# Altium PCB ATWILC1000-MR110UB_ATWINC15x0_MR210UB.PcbDoc
Units mm, origin at the board's own origin, x right, y up, seen from the top; angles counter-clockwise.
Board outline 14.73 x 21.72 mm, 4 copper layers (Top Layer, GND, PWR, Bottom Layer), stack 0.747 mm thick; 35 components, 38 nets, 191 pads, 221 vias.
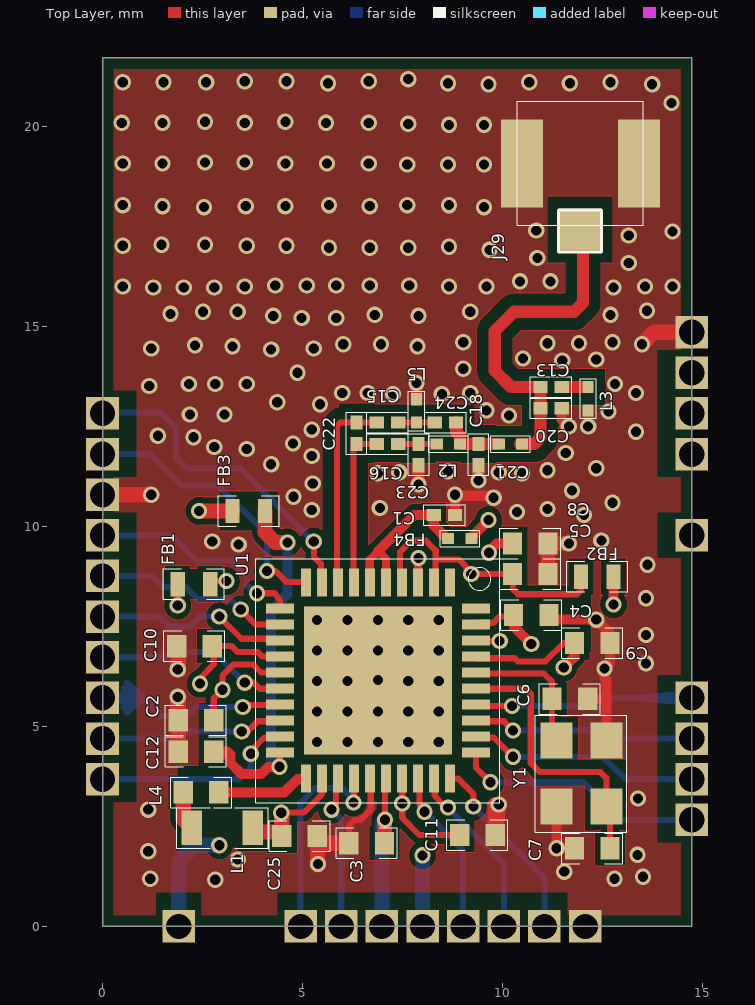
[diagram p0: Top Layer view]
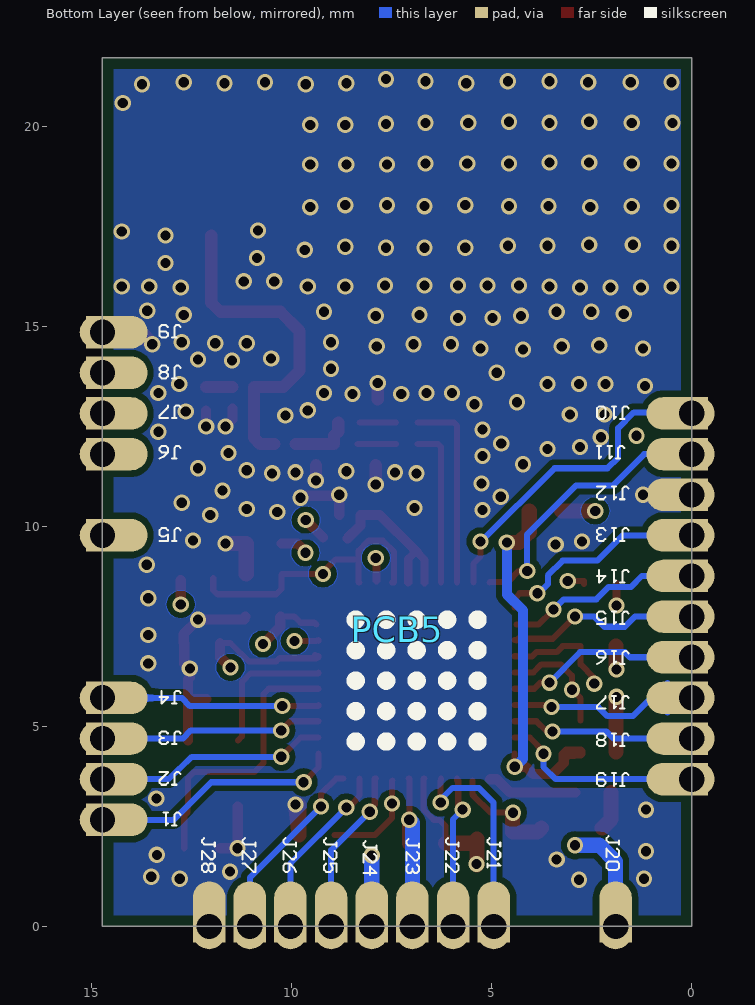
[diagram p1: Bottom Layer view, seen from below]
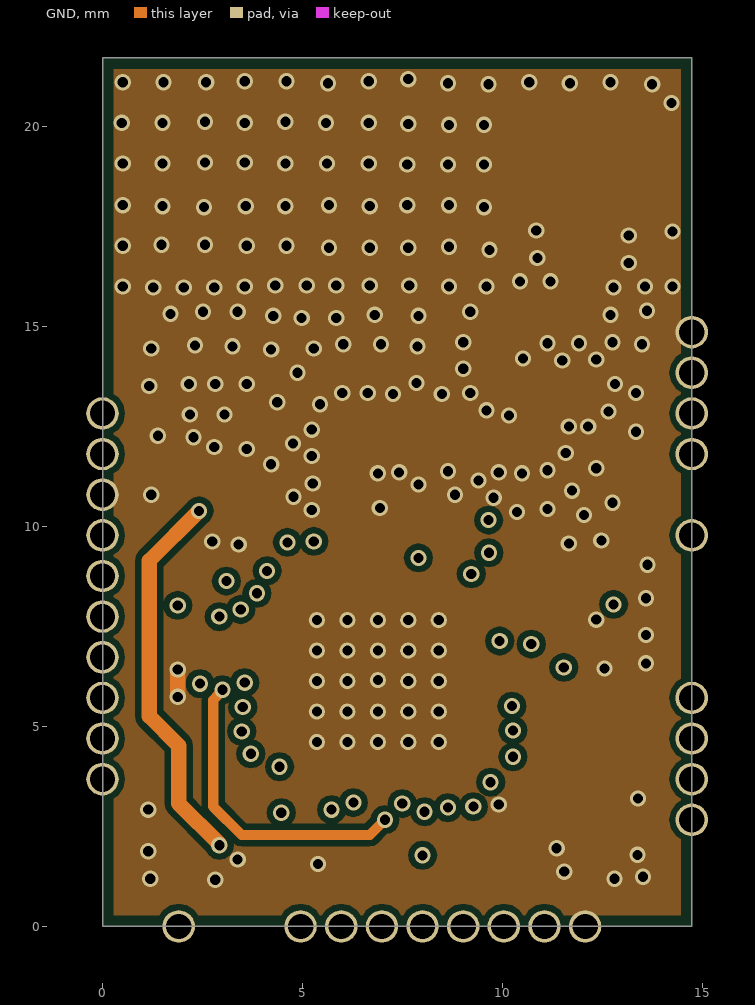
[diagram p2: GND]
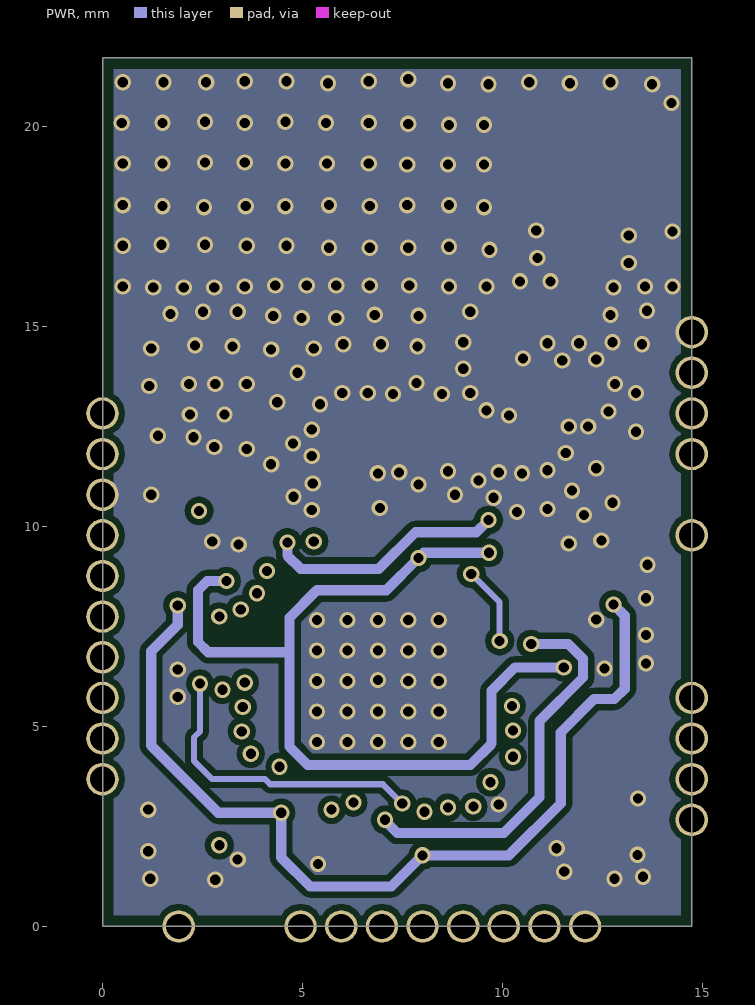
[diagram p3: PWR]

## Layer stack, top to bottom
Top Solder: solder mask 0.0102, Solder Resist, Dk 3.5
Top Layer: signal copper 0.0343
Dielectric 1: prepreg 0.2286, PP-006, Dk 4.1
GND: signal copper 0.0343
Dielectric 2: prepreg 0.1524, PP-006, Dk 4.1
PWR: signal copper 0.0343
Dielectric 3: prepreg 0.2286, PP-006, Dk 4.1
Bottom Layer: signal copper 0.0343
Bottom Solder: solder mask 0.0102, Solder Resist, Dk 3.5

## Board outline
0,0 14.73,0 14.73,21.72 0,21.72

## Design rules (kind name [scope] priority, off if disabled: settings)
Clearance [All] p1: gap=0.152 ignorepadtopadclearanceinfootprint=TRUE except(0.102: Track-SMDPad Track-Via SMDPad-Via)
ComponentClearance [All] p1: gap=0 collisioncheckmode=3 verticalgap=0 showdistances=FALSE
HoleToHoleClearance [All] p1 off: gap=0.254 allowstackedmicrovias=TRUE
MinimumSolderMaskSliver [All] p1 off: minsoldermaskwidth=0.254
PlaneConnect [All] p1: planeconnectstyle=Direct reliefexpansion=0.508 reliefentries=4 reliefconductorwidth=0.254 reliefairgap=0.254
PolygonConnect [All] p1: connectstyle=Direct reliefconductorwidth=0.254 reliefentries=4 polygonreliefangle="90 Angle" airgapwidth=0.254
RoutingVias [All] p1: holewidth=0.711 width=1.27 viastyle="Through Hole" minholewidth=0.711 minwidth=1.27 maxholewidth=0.711 maxwidth=1.27
SilkToSilkClearance [All] p1 off: silktosilkclearance=0.102
SilkToSolderMaskClearance [IsPad] p1 off: minsilkscreentomaskgap=0.254 clearancetoexposedcopper=TRUE
SolderMaskExpansion [All] p1: expansion=0.102 istentingtop=FALSE
Width [All] p1: maxlimit=0.406 minlimit=0.127 preferedwidth=0.127
24 further rules are at their usual default settings.

## Components (designator, comment, footprint, x,y, rotation, side; value= is the part's Value field where it differs from the comment)
C1 "CAP_1.0uF_0201" C0201 8.278,10.287 r270 top value=1.0uF
C2 "CAP_0.1uF_0402" 0402_M 2.335,5.156 r180 top value=0.1uF
C3 "CAP_0.1uF_0402" 0402_M 6.602,2.083 r180 top value=0.1uF
C4 "CAP_0.1uF_0402" 0402_M 10.717,7.788 r0 top value=0.1uF
C5 "CAP_1.0uF_0402" 0402_M 10.691,8.814 r0 top value=1.0uF
C6 "CAP_6.8pF_0402" 0402_M 11.682,5.69 r180 top value=6.8PF
C7 "CAP_6.8pF_0402" 0402_M 12.241,1.956 r0 top value=6.8PF
C8 "CAP_2.2uF_0402" 0402_M 10.691,9.576 r0 top value=2.2uF
C9 "CAP_0.1uF_0402" 0402_M 12.241,7.087 r0 top value=0.1uF
C10 "CAP_0.1uF_0402" 0402_M 2.297,7.01 r180 top value=0.1uF
C11 "CAP_2.2uF_0402" 0402_M 9.371,2.286 r0 top value=2.2uF
C12 "CAP_1.0uF_0402" 0402_M 2.335,4.369 r180 top value=1.0uF
C13 "CAP_0.5pF_0201" C0201 10.945,13.487 r270 top value=0.5PF
C15 "CAP_1.8pF_0201" C0201 7.389,12.598 r90 top value=1.8PF
C16 "CAP_1.8pF_0201" C0201 7.389,12.065 r90 top value=1.8PF
C18 "CAP_1.5pF_0201" C0201 9.396,12.065 r180 top value=1.5PF
C20 "CAP_1.5pF_0201" C0201 10.945,12.954 r270 top value=1.5PF
C21 "IND_2.6nH" LQP03T_0201 10.488,12.065 r90 top value=2.6nH
C22 "CAP_DNI" C0201 6.348,12.598 r180 top value=DNI
C23 "CAP_1pF_0201" C0201 7.897,12.065 r180 top value=1pF
C24 "CAP_1pF_0201" C0201 8.304,12.598 r270 top value=1pF
C25 "CAP_4.7uF_0402" 0402_M 4.926,2.261 r0 top value=4.7uF
FB1 "FB_BLM15AG121SN1" FB_M 2.284,8.56 r0 top value=BLM15AG121SN1D
FB2 "FB_BLM15AG121SN1" FB_M 12.368,8.748 r180 top value=BLM15AG121SN1D
FB3 "FB_BLM15AG121SN1" FB_M 3.656,10.389 r0 top value=BLM15AG121SN1D
FB4 "FB_BLM03AG121SN1D" LQP03T_0201 8.639,9.703 r270 top value=BLM03AG121SN1
J29 "U.FL-R-SMT" RECT_U_FL-R-SMT 11.936,17.425 r0 top locked value=U.FL-R-SMT-1(80)
L1 "IND_2.2uH" 0603_M 2.995,2.464 r0 top value=2.2uH
L2 "IND_3.3nH" LQP03T_0201 8.939,12.065 r90 top value=3.3nH
L3 "IND_1.7nH" LQP03T_0201 12.139,13.487 r180 top value=1.7nH
L4 "IND_15nH" 0402_M 2.462,3.353 r180 top value=15nH
L5 "IND_3.3nH" LQP03T_0201 7.847,12.598 r0 top value=3.3nH
PCB5 "WINC1500_Module_PAD" "module footprint" 14.73,0 r90 top
U1 "ATWINC1500B-MU-T" QFN-40-5X5-P4-HP85 6.881,6.16 r270 top
Y1 "26MHz_XTAL" FCX-05 12.596,2.997 r90 top value=26.000MHz

## Footprints (in the part's own frame and the unit in brackets; to place one, negate y for a bottom-side part, rotate by r counter-clockwise, add the part's x,y. Pads: shape width x height; smd on the part's side, far side on the other; paste and mask are expansions set on the pad)
0402_M [mil]
  rect 19x22 smd: 1(-17.5,0) 2(17.5,0)
  silkscreen extent -30,-15 30,15
0603_M [mil]
  rect 20x34 smd: 1(-30,0) 2(30,0)
  silkscreen extent -45,-20 45,20
C0201 [mil]
  rect 12x14 smd: 1(0,0) 2(0,21)
  silkscreen extent -10,-10 10,31
FB_M [mil]
  rect 14x24 smd: 1(-16,0) 2(16,0)
  silkscreen extent -30,-15 30,15
FCX-05 [mil]
  rect 35.4x31.5 smd: 1(0,0) 2(65,0) 3(65,49.2) 4(0,49.2)
  silkscreen extent -25,-20 90,70
LQP03T_0201 [mil]
  rect 11x12 smd: 1(0,0) 2(0,23)
  silkscreen extent -8,-8 8,31
"module footprint" [mil]
  rect 32x32 / inner round 32 / far side rect 32x32 hole 25: J1(105,0) J2(145,0) J3(185,0) J4(225,0) J5(385,0) J6(465,0) J7(505,0) J8(545,0) J9(585,0) J10(505,580) J11(465,580) J12(425,580) J13(385,580) J14(345,580) J15(305,580) J16(265,580) J17(225,580) J18(185,580) J19(145,580) J20(0,505) J21(0,385) J22(0,345) J23(0,305) J24(0,265) J25(0,225) J26(0,185) J27(0,145) J28(0,105)
  oval 32x66.93 smd far side paste-33.46 mask+2: J1(105,11.02) J2(145,11.02) J3(185,11.02) J4(225,11.02) J5(385,11.02) J6(465,11.02) J7(505,11.02) J8(545,11.02) J9(585,11.02) J10(505,568.98) J11(465,568.98) J12(425,568.98) J13(385,568.98) J14(345,568.98) J15(305,568.98) J16(265,568.98) J17(225,568.98) J18(185,568.98) J19(145,568.98)
  oval 66.93x32 smd far side paste-33.46 mask+2: J20(11.02,505) J21(11.02,385) J22(11.02,345) J23(11.02,305) J24(11.02,265) J25(11.02,225) J26(11.02,185) J27(11.02,145) J28(11.02,105)
QFN-40-5X5-P4-HP85 [mm]
  rect 0.7x0.25 smd: 1(-2.437,1.8) 2(-2.437,1.4) 3(-2.437,1) 4(-2.437,0.6) 5(-2.437,0.2) 6(-2.437,-0.2) 7(-2.437,-0.6) 8(-2.437,-1) 9(-2.437,-1.4) 10(-2.437,-1.8) 21(2.463,-1.8) 22(2.463,-1.4) 23(2.463,-1) 24(2.463,-0.6) 25(2.463,-0.2) 26(2.463,0.2) 27(2.463,0.6) 28(2.463,1) 29(2.463,1.4) 30(2.463,1.8)
  rect 0.25x0.7 smd: 11(-1.787,-2.45) 12(-1.387,-2.45) 13(-0.987,-2.45) 14(-0.587,-2.45) 15(-0.187,-2.45) 16(0.213,-2.45) 17(0.613,-2.45) 18(1.013,-2.45) 19(1.413,-2.45) 20(1.813,-2.45) 31(1.813,2.45) 32(1.413,2.45) 33(1.013,2.45) 34(0.613,2.45) 35(0.213,2.45) 36(-0.187,2.45) 37(-0.587,2.45) 38(-0.987,2.45) 39(-1.387,2.45) 40(-1.787,2.45)
  round 0.406 hole 0.254 mask+0: 41(-1.499,1.524) 41(-1.499,0.762) 41(-1.499,0) 41(-1.499,-0.762) 41(-1.499,-1.524) 41(-0.737,1.524) 41(-0.737,0.762) 41(-0.737,0) 41(-0.737,-0.762) 41(-0.737,-1.524) 41(0,0) 41(0.025,1.524) 41(0.025,0.762) 41(0.025,-0.762) 41(0.025,-1.524) 41(0.787,1.524) 41(0.787,0.762) 41(0.787,0) 41(0.787,-0.762) 41(0.787,-1.524) 41(1.549,1.524) 41(1.549,0.762) 41(1.549,0) 41(1.549,-0.762) 41(1.549,-1.524)
  rect 3.7x3.7 smd: 41(0.013,0)
  silkscreen extent -3.04,-3.05 3.06,3.05
RECT_U_FL-R-SMT [mm] "RECT_U_FL-R-SMT"
  rect 1.044x2.2 smd paste+0 mask+0.102: 1(-1.448,1.65) 2(1.473,1.65)
  rrect0% 1.05x1.05 smd paste+0 mask+0.102: 3(0,0)
  silkscreen extent -1.57,-0.56 1.57,3.2

## Part data
C1: "SMT CAP 1.0uF 4V 20% X6S 0201", Manufacturer=Murata, Part Number=GRM033C80G105MEA2D
C2 C3 C4 C9 C10: "SMT CAP CER 100NF 16V 10% X5R 0402", Manufacturer=Yageo, Part Number=CC0402KRX5R7BB104
C5 C12: "SMT CAP CER 1.0uF X5R 6.3V 0402 10%", Manufacturer=Yageo, Part Number=CC0402KRX5R5BB105
C6 C7: "SMT CAP 6.8pF 0.5pF 50V 0402 COG", Manufacturer=Murata, Part Number=GRM1555C1H6R8D
C8 C11: "SMT CAP 2.2uF 6.3V X5R 0402", Manufacturer=Taiyo, Part Number=JMK105BJ225MV
C13: "SMT CAP CER 0.5pF 0.1pF NPO 0201 25V", Manufacturer=Murata, Part Number=GRM0335C1ER50BA0
C15 C16: "SMT CAP CER 1.8PF 50V NP0 0201", Manufacturer=Murata, Part Number=GRM0335C1H1R8CA01D
C18 C20: "SMT CAP CER 1.8PF 50V NP0 0201", Manufacturer=Murata, Part Number=GRM0335C1H1R5CA01
C21: "IND 2.6NH 500MA 0201", Manufacturer=Murata, Part Number=LQP03TN2N6B02
C23 C24: "SMT CAP 1pF 50V 0201 ±0.25pF COG", Manufacturer=Murata, Part Number=GRM0335C1H1R0CA01D
C25: "SMT CAP CER 4.7UF 6.3V X5R 20% 0402", Manufacturer=Murata, Part Number=GRM155R60G475ME47D
FB1 FB2 FB3: "SMT IND 120 OHM 0402", Manufacturer=Murata, Part Number=BLM15AG121SN1D
FB4: "SMT Ferrite 120 OHM 200mA 0201", Manufacturer=Murata, Part Number=BLM03AG121SN1
J29: "SMT CONN RECPT ULTRA-MINI COAX", Manufacturer=HIROSE, Part Number=U.FL-R-SMT-1(80)
L1: "SMT IND POWER 2.2uH 1250mA 0.22ohms 0603 20%", Manufacturer=Murata, Part Number=LQM18PN2R2MFRL
L2 L5: "SMT IND 3.3+/-0.1NH 750MA 0201", Manufacturer=Murata, Part Number=LQP03TN3N3B02D
L3: "SMT FIXED IND 1.7nH 600MA 150 MOHM", Manufacturer=Murata, Part Number=LQP03TN1N7B02
L4: "SMT IND 15NH 5% 0402", Manufacturer=Murata, Part Number=LQG15HS15NJ02D
PCB5: "Castalled_Pads"
U1: "SMT IC WiFi 40QFN", Manufacturer="Microchip Technology", Part Number=ATWINC1500B-MU-T
Y1: "SMT CRYSTAL 26MHz", Manufacturer=Taitien, Part Number=A0183-X-001-3(M)

## Via types
v1: diameter 0.406, hole 0.254, Top Layer to Bottom Layer, tented both sides, 221 vias

## Nets (pads, with @x,y where several pads share a name; then routed paths per layer and width w, separated by ;. In a path a pad name is that pad's centre, name@x,y a point inside that pad or via, vN(x,y) a via of type N, cw(c..) or ccw(c..) an arc to the next point about the centre after c; other vN are vias at no path point)
1P3V: C25.1 FB1.1 FB2.1 L1.2 PCB5.J24 U1.22 | length 31.2
  Top Layer w0.152: v1(4.468,2.845) 4.481,2.845 5.028,2.845 5.481,3.298 5.481,3.3 ; 5.435,3.254 5.481,3.3 ; U1.22@5.481,3.647 5.481,3.3
  Top Layer w0.203: v1(1.878,8.026) FB1.1
  Top Layer w0.254: FB2.1@12.774,8.534 v1(12.774,8.052) FB2.1@12.774,8.661
  Top Layer w0.381: L1.2 3.859,2.362 4.481,2.362 v1@4.481,2.845
  PWR w0.254: 8.964,1.778 v1(7.999,1.778) ; 1.878,7.544 1.217,6.883 1.217,4.521 2.894,2.845 v1(4.468,2.845) 4.468,1.722 5.187,1.003 7.224,1.003 v1(7.999,1.778) ; 1.878,7.544 v1(1.878,8.026) 1.878,7.544 ; v1(7.999,1.778) 10.158,1.778 11.453,3.073 11.453,4.851 12.292,5.69 12.8,5.69 13.054,5.944 13.054,7.772 ; 13.054,7.772 v1(12.774,8.052) 13.054,7.772
  Bottom Layer w0.381: PCB5.J24@7.999,0 v1(7.999,1.778)
CHIP_EN: PCB5.J22 U1.23 | length 3.8
  Top Layer w0.152: v1(5.726,2.921) 5.835,3.03 U1.23@5.835,3.6 ; U1.23@5.833,3.6 U1.23@5.833,3.647 ; U1.23@5.865,3.647 U1.23@5.865,3.696
  Bottom Layer w0.152: v1(5.726,2.921) 5.967,2.68 PCB5.J22@5.967,0
GND: C1.2 C2.2 C3.2 C4.2 C5.2 C6.1 C7.1 C8.2 C9.2 C10.2 C11.2 C12.2 C18.2 C20.2 C23.2 C25.2 J29.1 J29.2 L3.2 L5.2 PCB5.J9 PCB5.J12 PCB5.J28 U1.25 U1.41 Y1.2 Y1.4 | length 29.9
  Top Layer w0.152: 5.891,2.095 C3.2 6.157,2.515 6.31,2.667 6.451,2.667 6.705,2.921 ; U1.25@6.678,3.696 6.681,3.696 6.704,3.696 6.704,3.647 6.704,2.922 ; v1@12.546,6.35 v1(12.546,6.452)
  Top Layer w0.254: C1.2 v1(8.812,10.795) 8.837,10.77 v1@9.701,10.77 ; C4.2@11.161,7.747 11.187,7.671 v1(12.342,7.671) 12.698,7.315 12.698,7.099 C9.2 12.685,6.579 12.673,6.579 v1(12.546,6.452) ; Y1.4 v1@11.347,1.956 ; C20.2 11.479,12.675 v1(11.657,12.497) ; v1(12.139,12.497) L3.2 ; v1@12.546,6.35 12.546,6.223 12.596,6.172 12.596,5.69 ; Y1.2 12.596,5.69 ; v1@11.347,1.956 C7.1 ; v1@11.347,1.956 v1(11.352,1.956) ; v1(11.352,1.956) C7.1 ; v1(11.352,1.956) C7.1 ; v1(11.352,1.956) C7.1 ; 12.596,5.69 C6.1 12.596,5.69
  Top Layer w0.305: L5.2 v1(7.847,13.589) ; v1(7.897,11.049) C23.2 ; v1(9.396,11.151) C18.2
  Top Layer w0.381: PCB5.J12@-0.002,10.795 v1(1.217,10.795) ; C12.2 C2.2 C2.2@1.89,5.232 ; C10.2@1.89,6.972 1.89,6.413 C10.2@1.89,7.01 ; v1@5.37,1.537 C25.2@5.37,2.083 ; C25.2@5.37,2.184 C25.2@5.37,2.083 ; C3.2 5.891,2.083 C25.2@5.37,2.083 ; C11.2@9.815,2.324 v1(9.904,3.048) ; v1(13.485,14.554) 13.79,14.859 PCB5.J9@14.73,14.859 ; v1(1.878,5.74) 1.89,5.194 v1@1.89,5.74 ; v1(1.878,5.74) C2.2@1.89,5.232 ; v1(1.878,5.74) v1@1.89,5.74 ; C2.2@1.89,5.232 v1@1.89,5.74 ; v1(9.904,3.048) 9.815,3.048 C11.2 v1(9.904,3.048) ; C8.2 11.136,8.852 11.136,9.538 C5.2 C8.2 ; C8.2 v1(11.657,9.576) C8.2
  GND w0.381: v1(1.878,5.74) v1(1.878,6.426) v1(1.878,5.74)
  other v1: 2.817,1.168 1.192,1.194 12.8,1.194 13.511,1.245 11.542,1.372 5.383,1.56 3.376,1.676 13.371,1.791 1.141,1.88 1.141,2.921 13.384,3.2 13.587,6.579 13.587,7.29 13.587,8.204 13.625,9.042 3.402,9.55 2.741,9.627 12.469,9.652 12.038,10.287 10.361,10.363 5.23,10.414 11.123,10.439 6.932,10.465 12.749,10.592 9.777,10.719 4.773,10.744 11.733,10.897 5.256,11.074 6.881,11.328 10.488,11.328 7.415,11.354 9.904,11.354 8.634,11.379 11.123,11.405 12.342,11.455 4.214,11.557 5.23,11.76 11.58,11.836 3.605,11.938 2.792,11.989 4.76,12.078 2.271,12.23 1.382,12.268 13.333,12.37 5.23,12.421 10.158,12.776 2.182,12.802 3.046,12.802 12.647,12.878 9.599,12.903 5.434,13.056 4.367,13.106 7.262,13.31 8.482,13.31 5.992,13.335 6.627,13.335 9.193,13.335 13.333,13.335 1.166,13.513 2.157,13.564 2.817,13.564 3.605,13.564 12.812,13.564 4.875,13.843 9.015,13.945 11.491,14.148 12.342,14.173 10.514,14.199 4.214,14.427 1.217,14.453 5.281,14.453 3.249,14.503 7.872,14.503 2.309,14.529 6.018,14.554 6.958,14.554 11.123,14.58 11.911,14.58 9.015,14.605 12.749,14.605 4.976,15.215 5.84,15.215 4.265,15.265 7.897,15.265 6.805,15.291 12.698,15.291 1.7,15.316 2.513,15.367 3.376,15.367 9.193,15.367 13.612,15.392 1.268,15.977 2.03,15.977 2.792,15.977 12.774,15.977 0.506,16.002 3.554,16.002 8.659,16.002 9.599,16.002 13.562,16.002 14.247,16.002 4.316,16.027 5.103,16.027 5.84,16.027 6.678,16.027 7.669,16.027 10.437,16.129 11.199,16.129 13.155,16.586 10.869,16.713 9.675,16.916 5.662,16.967 6.678,16.967 7.643,16.967 8.659,16.993 0.506,17.018 3.605,17.018 4.595,17.018 1.471,17.043 2.563,17.043 13.155,17.272 14.247,17.374 10.844,17.399 2.538,17.983 9.536,17.983 1.497,18.009 3.579,18.009 4.57,18.009 6.678,18.009 0.506,18.034 5.662,18.034 7.618,18.034 8.659,18.034 7.618,19.05 8.634,19.05 9.536,19.05 0.506,19.075 1.497,19.075 4.57,19.075 5.611,19.075 6.653,19.075 2.563,19.101 3.554,19.101 8.659,20.041 9.536,20.041 7.643,20.066 0.481,20.091 1.497,20.091 3.554,20.091 5.586,20.091 6.653,20.091 2.563,20.117 4.57,20.117 14.222,20.587 9.65,21.057 13.739,21.057 5.637,21.082 8.634,21.082 11.682,21.082 0.506,21.107 1.522,21.107 2.589,21.107 10.666,21.107 12.698,21.107 3.554,21.133 4.595,21.133 6.653,21.133 7.643,21.184
GPIO_1: PCB5.J21 U1.24 | length 5.4
  Top Layer w0.152: U1.24@6.272,3.647 U1.24@6.272,3.696 ; v1@6.281,3.099 U1.24@6.281,3.647
  Bottom Layer w0.152: PCB5.J21@4.951,0 4.951,3.099 5.319,3.467 5.98,3.467 6.272,3.175 v1(6.272,3.099)
GPIO_3: PCB5.J25 U1.28 | length 4.2
  Top Layer w0.152: U1.28@7.897,3.696 7.923,3.696 7.923,3.647 7.923,3.048 v1@7.999,2.921
  Bottom Layer w0.152: v1@7.999,2.921 9.015,1.905 PCB5.J25@9.015,0
  other v1: 8.05,2.87
GPIO_4: PCB5.J26 U1.29 | length 4.4
  Top Layer w0.152: U1.29@8.304,3.696 8.304,3.647 8.304,3.277 8.558,2.972 v1(8.634,2.972)
  Bottom Layer w0.152: v1(8.634,2.972) 10.031,1.575 PCB5.J26@10.031,0
GPIO_5: PCB5.J27 U1.30 | length 4.8
  Top Layer w0.152: U1.30@8.71,3.696 8.888,3.696 9.269,3.315 v1(9.269,2.997)
  Bottom Layer w0.152: v1(9.269,2.997) 11.047,1.219 PCB5.J27@11.047,0
GPIO_6: PCB5.J1 U1.31 | length 6.6
  Top Layer w0.152: v1(9.701,3.607) 9.332,3.975 ; 9.332,3.975 9.332,4.318 9.332,3.975
  Bottom Layer w0.152: v1(9.701,3.607) 12.012,3.607 12.952,2.667 PCB5.J1@14.73,2.667
I2C_SCL: PCB5.J2 U1.32 | length 5.8
  Top Layer w0.152: U1.32@9.332,4.724 9.381,4.724 9.777,4.724 v1(10.26,4.242)
  Bottom Layer w0.152: v1(10.26,4.242) 12.495,4.242 13.079,3.683 PCB5.J2@14.73,3.683
I2C_SDA: PCB5.J3 U1.33 | length 5.6
  Top Layer w0.152: U1.33@9.332,5.131 9.381,5.131 10.031,5.131 v1(10.26,4.902)
  Bottom Layer w0.152: v1(10.26,4.902) 12.52,4.902 12.723,4.699 PCB5.J3@14.73,4.699
IRQN: PCB5.J13 U1.11 | length 5.4
  Top Layer w0.152: v1(3.859,8.331) 4.303,8.331 4.43,8.153 U1.11@4.43,7.976
  Bottom Layer w0.152: PCB5.J13@-0.002,9.779 1.729,9.779 2.36,9.148 3.228,9.148 3.596,8.78 3.596,8.56 3.825,8.331 v1(3.859,8.331)
NetC1_1: C1.1 FB4.1 U1.5 U1.6 | length 6.1
  Top Layer w0.203: U1.6@6.678,8.598 6.678,8.647 U1.6@6.678,8.839 ; 6.881,9.373 6.678,9.169 ; 6.894,9.385 7.085,9.195 ; U1.5@7.085,8.598 7.085,8.647 U1.5@7.085,8.839 ; U1.6@6.678,8.839 6.678,9.169 ; U1.6@6.678,8.839 6.678,9.169 ; U1.5@7.085,8.839 7.085,9.195 ; U1.5@7.085,8.839 7.085,9.195
  Top Layer w0.254: 6.881,9.373 6.894,9.385 7.796,10.287 ; C1.1@8.253,10.287 7.796,10.287 ; FB4.1@8.596,9.703 8.278,10.033 ; FB4.1@8.609,9.703 8.278,10.033 ; 7.796,10.287 C1.1 ; 8.278,10.033 C1.1 ; 8.278,10.033 C1.1
NetC5_1: C5.1 FB2.2 U1.2 U1.4 U1.38 | length 9.8
  Top Layer w0.152: U1.4@7.438,8.598 7.438,8.647 7.438,9.363 7.718,9.644 8.082,9.644 8.329,9.397 8.329,9.175 8.901,9.175 9.218,8.858 v1(9.218,8.814) C5.1 10.247,8.801 10.26,8.788 10.26,8.433 10.387,8.306 11.86,8.306 11.961,8.407 FB2.2@11.961,8.707 ; U1.4@7.466,8.598 U1.4 U1.4@7.491,8.598 ; U1.2@8.304,8.598 U1.2@8.329,8.598 ; U1.2@8.327,8.647 8.327,9.164 ; U1.38@9.332,7.137 U1.38 U1.38@9.332,7.163 ; U1.38@9.381,7.147 9.391,7.137 v1(9.927,7.137)
  PWR w0.152: v1(9.218,8.814) 9.927,8.105 v1(9.927,7.137)
NetC6_2: C6.2 U1.36 Y1.3 | length 3.5
  Top Layer w0.152: U1.36@9.332,6.35 U1.36 9.332,6.325 9.381,6.325 11.034,6.325 11.237,6.121 C6.2 11.237,4.75 11.245,4.75 Y1.3
NetC7_2: C7.2 U1.35 Y1.1 | length 7.5
  Top Layer w0.152: U1.35@9.332,5.944 9.381,5.944 U1.35@9.574,5.944 ; C7.2 12.685,2.769 12.609,2.845 12.609,2.984 Y1.1 12.596,3.708 12.444,3.861 10.933,3.861 10.704,4.089 10.704,5.817 10.577,5.944 10.133,5.944 ; U1.35@9.574,5.944 10.133,5.944 ; U1.35@9.574,5.944 10.133,5.944
NetC8_1: C8.1 C9.1 FB1.2 U1.3 U1.37 | length 27.4
  Top Layer w0.152: FB1.2 2.69,8.636 v1(3.097,8.636) ; U1.37@9.332,6.731 U1.37 U1.37@9.332,6.756 ; U1.37@9.381,6.706 10.307,6.706 10.383,6.629 11.072,6.629 11.53,7.087 C9.1 ; U1.37@9.381,6.747 U1.37@9.419,6.784
  Top Layer w0.203: U1.3@7.881,8.647 v1@7.881,9.197
  Top Layer w0.254: v1(9.658,9.342) 9.658,9.38 9.853,9.576 C8.1 ; v1(11.53,6.477) 11.784,6.731 ; 11.796,6.731 C9.1
  PWR w0.152: v1@7.897,9.119 v1@7.904,9.112
  PWR w0.254: v1(3.097,8.636) 2.614,8.636 2.386,8.407 2.386,7.112 2.64,6.858 4.672,6.858 ; v1(9.658,9.342) 8.027,9.342 v1(7.897,9.213) 7.092,8.407 5.357,8.407 4.672,7.722 4.672,6.858 ; v1(11.53,6.477) 10.31,6.477 9.726,5.893 9.726,4.572 9.193,4.039 5.129,4.039 4.672,4.496 4.672,6.858
NetC10_1: C10.1 C11.1 U1.14 U1.27 | length 13
  Top Layer w0.152: v1(2.436,6.071) 2.449,6.083 2.449,6.223 2.779,6.553 2.779,7.01 3.225,7.01 3.377,6.858 3.883,6.858 3.995,6.747 U1.14@4.381,6.747 ; U1.14@4.381,6.756 U1.14@4.43,6.756 ; U1.27@7.481,3.647 7.491,3.637 v1(7.491,3.073) 7.491,2.718 7.923,2.286 C11.1
  PWR w0.152: v1(2.436,6.071) 2.436,4.877 2.284,4.724 2.284,4.14 2.741,3.683 4.062,3.683 4.189,3.556 7.008,3.556 v1(7.491,3.073)
NetC12_1: C12.1 FB3.2 FB4.2 U1.20 | length 18.3
  Top Layer w0.152: v1@4.418,3.988 4.43,4 U1.20@4.43,4.318
  Top Layer w0.254: C12.1@2.779,4.331 3.198,4.293 ; v1@4.418,3.988 4.138,3.988 3.96,3.81 3.478,3.81 3.198,4.089 3.198,4.293 ; FB4.2@9.214,9.724 v1(9.65,10.16) ; C12.1 3.122,4.369 ; C12.1 3.122,4.369 ; C12.1 3.122,4.369 ; 3.122,4.369 3.198,4.293
  Top Layer w0.381: FB3.2 4.062,9.855 4.316,9.601 v1(4.621,9.601)
  PWR w0.254: 4.621,9.271 4.951,8.941 6.907,8.941 7.821,9.855 9.345,9.855 ; 4.621,9.271 v1(4.621,9.601) ; 4.621,9.271 v1(4.621,9.601) ; 4.621,9.271 v1(4.621,9.601) ; 9.345,9.855 v1(9.65,10.16) 9.345,9.855
  Bottom Layer w0.254: v1@4.418,3.988 4.214,4.191 4.214,7.899 4.621,8.306 v1(4.621,9.601)
  other v1: 4.424,3.994
NetC13_1: C13.1 C20.1 C21.1 J29.3 | length 8.3
  Top Layer w0.305: C21.1@10.437,12.065 10.793,12.065 10.945,12.217 C20.1 C13.1 10.209,13.487 9.802,13.894 9.802,14.884 10.285,15.367 11.784,15.367 12.012,15.596 J29.3@12.012,17.273
NetC13_2: C13.2 L3.1 | length 0.7
  Top Layer w0.305: C13.2 L3.1
NetC15_1: C15.1 C24.1 L5.1 | length 0.9
  Top Layer w0.152: C15.1 L5.1 C24.1
NetC15_2: C15.2 C22.1 U1.8 | length 4.9
  Top Layer w0.152: U1.8@5.865,8.598 5.865,8.647 5.865,12.522 5.942,12.598 C22.1 C15.2
NetC16_1: C16.1 C23.1 L2.2 | length 1
  Top Layer w0.152: C16.1 C23.1 L2.2
NetC16_2: C16.2 C22.2 U1.7 | length 4
  Top Layer w0.152: U1.7@6.272,8.598 6.272,8.647 6.272,11.989 C22.2 C16.2
NetC18_1: C18.1 C21.2 C24.2 L2.1 | length 1.5
  Top Layer w0.305: C24.2 8.837,12.37 8.939,12.268 L2.1 C18.1 C21.2
NetL1_1: L1.1 L4.2 | length 1
  Top Layer w0.381: L4.2 2.017,2.68 L1.1
NetL4_1: L4.1 U1.21 | length 2.3
  Top Layer w0.254: L4.1 4.545,3.353 4.875,3.683 U1.21@5.04,3.683
RESET_N: PCB5.J4 U1.34 | length 8.3
  Top Layer w0.152: U1.34@9.332,5.537 9.332,5.512 9.381,5.512 v1(10.234,5.512)
  Bottom Layer w0.152: v1(10.234,5.512) 12.546,5.512 12.749,5.715 13.333,5.715 ; PCB5.J4@14.256,5.626 13.333,5.715 ; PCB5.J4@14.256,5.804 13.333,5.715 ; PCB5.J4@14.73,5.715 PCB5.J4@14.26,5.715 ; 13.333,5.715 PCB5.J4@14.26,5.715 ; 13.333,5.715 PCB5.J4@14.26,5.715
SPI_CFG: PCB5.J10 U1.9 | length 8.2
  Top Layer w0.152: v1(5.281,9.627) 5.281,9.246 5.459,9.068 5.459,8.647 U1.9@5.459,8.598
  Bottom Layer w0.152: PCB5.J10@-0.002,12.827 0.023,12.852 1.446,12.852 1.839,12.459 1.839,11.722 2.106,11.455 3.427,11.455 5.256,9.627 v1(5.281,9.627)
SPI_CLK: PCB5.J18 U1.18 | length 4.9
  Top Layer w0.152: v1(3.478,4.877) 3.63,4.877 3.884,5.131 ; U1.18@4.43,5.131 4.381,5.131 U1.18@4.189,5.131 ; 3.884,5.131 U1.18@4.189,5.131 ; 3.884,5.131 U1.18@4.189,5.131
  Bottom Layer w0.152: PCB5.J18@-0.002,4.699 1.954,4.699 2.132,4.877 v1(3.478,4.877)
SPI_RXD: PCB5.J15 U1.13 | length 4.9
  Top Layer w0.152: v1(2.919,7.747) 3.473,7.193 4.335,7.193 U1.13@4.365,7.163 ; U1.13@4.381,7.147 U1.13@4.365,7.163 ; U1.13@4.43,7.163 4.381,7.163 U1.13@4.365,7.163
  Bottom Layer w0.152: PCB5.J15@-0.002,7.747 1.42,7.747 1.674,7.493 2.182,7.493 2.436,7.747 v1(2.919,7.747)
SPI_SSN: PCB5.J16 U1.16 | length 5.3
  Top Layer w0.152: U1.16@4.43,5.944 4.381,5.944 U1.16@4.189,5.944 ; 3.783,6.096 3.935,5.944 ; 3.783,6.096 v1(3.554,6.096) 3.783,6.096 ; 3.935,5.944 U1.16@4.189,5.944 ; 3.935,5.944 U1.16@4.189,5.944
  Bottom Layer w0.152: PCB5.J16@-0.002,6.731 1.547,6.731 1.674,6.858 2.792,6.858 v1(3.554,6.096)
SPI_TXD: PCB5.J17 U1.17 | length 8.8
  Top Layer w0.152: v1(3.503,5.486) 3.554,5.537 4.381,5.537 U1.17@4.43,5.537
  Bottom Layer w0.152: PCB5.J17@-0.002,5.715 PCB5.J17@0.468,5.715 ; PCB5.J17@0.475,5.626 0.827,5.682 0.936,5.699 0.984,5.706 PCB5.J17@1.039,5.715 ; PCB5.J17@0.475,5.804 0.816,5.75 0.941,5.731 PCB5.J17@1.039,5.715 ; PCB5.J17@0.519,5.479 0.85,5.629 0.932,5.666 0.987,5.691 PCB5.J17@1.039,5.715 ; PCB5.J17@0.519,5.951 0.825,5.812 0.959,5.751 PCB5.J17@1.039,5.715 ; PCB5.J17@0.603,5.345 0.887,5.586 0.946,5.635 0.99,5.673 PCB5.J17@1.039,5.715 ; PCB5.J17@0.603,6.085 0.853,5.873 0.974,5.77 PCB5.J17@1.039,5.715 ; v1(3.503,5.486) 2.335,5.486 2.106,5.258 1.471,5.258 1.039,5.69 PCB5.J17@1.039,5.715 ; PCB5.J17@0.468,5.715 PCB5.J17@0.816,5.715 ; PCB5.J17@0.468,5.715 PCB5.J17@0.816,5.715 ; PCB5.J17@0.816,5.715 PCB5.J17@0.936,5.715 ; PCB5.J17@0.816,5.715 PCB5.J17@0.936,5.715 ; PCB5.J17@0.936,5.715 PCB5.J17@1.039,5.715 ; PCB5.J17@0.936,5.715 PCB5.J17@1.039,5.715
UART_RXD: PCB5.J19 U1.19 | length 5.1
  Top Layer w0.152: v1(3.706,4.318) 3.706,4.386 4.044,4.724 U1.19@4.43,4.724
  Bottom Layer w0.152: PCB5.J19@-0.002,3.683 0.278,3.683 3.402,3.683 3.706,3.988 v1(3.706,4.318)
UART_TXD: PCB5.J14 U1.12 | length 4.9
  Top Layer w0.152: v1@3.478,7.899 3.83,7.547 U1.12@4.381,7.547
  Bottom Layer w0.152: PCB5.J14@-0.002,8.763 1.243,8.763 1.522,8.484 2.081,8.484 2.386,8.179 3.198,8.179 v1(3.452,7.925)
VBAT: FB3.1 PCB5.J20 | length 14.1
  Top Layer w0.381: v1(2.411,10.389) FB3.1 v1(2.411,10.389)
  GND w0.381: v1(2.411,10.389) 1.166,9.144 1.166,5.258 1.903,4.521 1.903,3.073 2.919,2.057 v1(2.919,2.032)
  Bottom Layer w0.381: PCB5.J20@1.903,0 1.903,1.626 2.309,2.032 v1(2.919,2.032)
VDDIO: C2.1 C3.1 C4.1 PCB5.J23 U1.15 U1.26 U1.39 | length 28
  Top Layer w0.152: C2.1 2.779,5.702 v1(2.995,5.918) 2.995,6.274 3.275,6.553 3.757,6.553 3.96,6.35 ; U1.15@4.43,6.35 4.381,6.35 U1.15@4.189,6.35 ; v1(7.059,2.667) 7.059,3.647 7.059,3.696 7.081,3.696 U1.26@7.085,3.696 ; U1.39@9.381,7.547 9.428,7.593 9.776,7.593 9.91,7.727 9.929,7.747 C4.1@10.272,7.747 ; 3.96,6.35 U1.15@4.189,6.35 ; 3.96,6.35 U1.15@4.189,6.35
  Top Layer w0.254: C4.1@10.272,7.747 10.285,7.734 10.285,7.493 v1(10.717,7.061)
  Top Layer w0.381: C3.1 7.046,2.654 v1(7.059,2.667)
  GND w0.254: v1(7.059,2.667) 6.678,2.286 3.478,2.286 2.767,2.997 2.767,5.664 ; 2.767,5.664 v1(2.995,5.918) 2.995,5.893 2.767,5.664
  PWR w0.254: v1(7.059,2.667) 7.059,2.642 7.364,2.337 10.031,2.337 10.92,3.226 10.92,5.131 12.012,6.223 12.012,6.693 11.644,7.061 ; 11.644,7.061 v1(10.717,7.061) 11.644,7.061
  Bottom Layer w0.381: PCB5.J23@6.983,0 6.983,2.591 v1(7.059,2.667)
WAKE: PCB5.J11 U1.10 | length 7.8
  Top Layer w0.152: v1(4.113,8.89) 4.322,8.89 ; v1(4.113,8.89) 4.322,8.89 ; v1(4.113,8.89) 4.322,8.89 ; 4.322,8.89 4.601,8.611 ; 4.601,8.611 5.04,8.611 5.043,8.608 5.053,8.598 4.601,8.611
  Bottom Layer w0.152: PCB5.J11@-0.002,11.811 1.192,11.811 1.979,11.024 2.894,11.024 4.113,9.804 v1(4.113,8.89)
pads on no net: PCB5.J5 PCB5.J6 PCB5.J7 PCB5.J8 U1.1 U1.40

## Polygon pours and split planes (outlines as drawn)
GND on Bottom Layer "Bottom Layer-$Net0 1" (solid, pour order 25): 541 vertices, not listed, extent 0.28,0.282 14.448,21.435
GND on Bottom Layer "Bottom Layer-$Net0" (solid, pour order 26): 1.816,10.861 1.864,10.824 1.92,10.801 1.979,10.793 2.798,10.793 3.882,9.709 3.882,9.161 3.86,9.143 3.816,9.089 3.783,9.027 3.762,8.96 3.761,8.944 3.758,8.944 3.391,9.311 3.343,9.348 3.287,9.371 3.228,9.379 2.456,9.379 1.892,9.942 1.844,9.979 1.789,10.002 1.729,10.01 1.232,10.01 1.219,10.042 1.171,10.12 1.112,10.189 1.043,10.248 0.966,10.295 0.882,10.33 0.793,10.352 0.703,10.359 0.28,10.359 0.28,11.231 0.703,11.231 0.793,11.238 0.882,11.26 0.966,11.295 1.043,11.342 1.112,11.401 1.171,11.47 1.184,11.49 1.186,11.491
no net on Bottom Layer "Bottom Layer-No Net" (solid, pour order 34): 2.411,10.746 2.341,10.739 2.274,10.719 2.213,10.686 2.158,10.641 2.114,10.587 2.081,10.525 2.06,10.458 2.054,10.389 2.06,10.319 2.081,10.252 2.114,10.19 2.158,10.136 2.213,10.091 2.274,10.058 2.341,10.038 2.411,10.031 2.481,10.038 2.548,10.058 2.609,10.091 2.664,10.136 2.708,10.19 2.741,10.252 2.762,10.319 2.768,10.389 2.762,10.458 2.741,10.525 2.708,10.587 2.664,10.641 2.609,10.686 2.548,10.719 2.481,10.739
no net on Bottom Layer "Bottom Layer-No Net 1" (solid, pour order 33): 7.897,9.57 7.828,9.563 7.761,9.543 7.699,9.51 7.645,9.465 7.6,9.411 7.567,9.349 7.547,9.282 7.54,9.213 7.547,9.143 7.567,9.076 7.6,9.014 7.645,8.96 7.699,8.915 7.761,8.882 7.828,8.862 7.897,8.855 7.967,8.862 8.034,8.882 8.096,8.915 8.15,8.96 8.194,9.014 8.227,9.076 8.248,9.143 8.255,9.213 8.248,9.282 8.227,9.349 8.194,9.411 8.15,9.465 8.096,9.51 8.034,9.543 7.967,9.563
no net on Bottom Layer "Bottom Layer-No Net 2" (solid, pour order 32): 9.65,10.517 9.58,10.51 9.513,10.49 9.452,10.457 9.397,10.413 9.353,10.359 9.32,10.297 9.3,10.23 9.293,10.16 9.3,10.09 9.32,10.023 9.353,9.961 9.397,9.907 9.452,9.863 9.513,9.83 9.58,9.81 9.65,9.803 9.72,9.81 9.787,9.83 9.848,9.863 9.903,9.907 9.947,9.961 9.98,10.023 10.001,10.09 10.007,10.16 10.001,10.23 9.98,10.297 9.947,10.359 9.903,10.413 9.848,10.457 9.787,10.49 9.72,10.51
no net on Bottom Layer "Bottom Layer-No Net 3" (solid, pour order 31): 9.658,9.699 9.588,9.693 9.521,9.672 9.459,9.639 9.405,9.595 9.36,9.541 9.327,9.479 9.307,9.412 9.3,9.342 9.307,9.272 9.327,9.205 9.359,9.146 9.358,9.143 9.357,9.143 9.355,9.144 9.288,9.164 9.218,9.171 9.149,9.164 9.082,9.144 9.02,9.111 8.965,9.066 8.921,9.012 8.888,8.951 8.868,8.884 8.861,8.814 8.868,8.744 8.888,8.677 8.921,8.615 8.965,8.561 9.02,8.517 9.082,8.484 9.149,8.463 9.218,8.457 9.288,8.463 9.355,8.484 9.417,8.517 9.471,8.561 9.515,8.615 9.548,8.677 9.569,8.744 9.576,8.814 9.569,8.884 9.548,8.951 9.517,9.01 9.518,9.013 9.519,9.013 9.521,9.012 9.588,8.992 9.658,8.985 9.727,8.992 9.794,9.012 9.856,9.045 9.91,9.089 9.955,9.144 9.988,9.205 10.008,9.272 10.015,9.342 10.008,9.412 9.988,9.479 9.955,9.541 9.91,9.595 9.856,9.639 9.794,9.672 9.727,9.693
no net on Bottom Layer "Bottom Layer-No Net 4" (solid, pour order 30): 10.717,7.418 10.647,7.412 10.58,7.391 10.518,7.358 10.464,7.314 10.42,7.26 10.387,7.198 10.366,7.131 10.359,7.061 10.366,6.991 10.387,6.924 10.42,6.863 10.464,6.809 10.518,6.764 10.58,6.731 10.647,6.711 10.717,6.704 10.787,6.711 10.853,6.731 10.915,6.764 10.97,6.809 11.014,6.863 11.047,6.924 11.067,6.991 11.074,7.061 11.067,7.131 11.047,7.198 11.014,7.26 10.97,7.314 10.915,7.358 10.853,7.391 10.787,7.412
no net on Bottom Layer "Bottom Layer-No Net 5" (solid, pour order 29): 11.53,6.834 11.46,6.827 11.393,6.807 11.331,6.774 11.277,6.73 11.232,6.676 11.2,6.614 11.179,6.547 11.172,6.477 11.179,6.407 11.2,6.34 11.232,6.278 11.277,6.224 11.331,6.18 11.393,6.147 11.46,6.127 11.53,6.12 11.599,6.127 11.666,6.147 11.728,6.18 11.782,6.224 11.827,6.278 11.86,6.34 11.88,6.407 11.887,6.477 11.88,6.547 11.86,6.614 11.827,6.676 11.782,6.73 11.728,6.774 11.666,6.807 11.599,6.827
no net on Bottom Layer "Bottom Layer-No Net 6" (solid, pour order 28): 12.774,8.409 12.705,8.402 12.638,8.382 12.576,8.349 12.521,8.304 12.477,8.25 12.444,8.189 12.424,8.122 12.417,8.052 12.424,7.982 12.444,7.915 12.477,7.853 12.521,7.799 12.576,7.755 12.638,7.722 12.705,7.701 12.774,7.695 12.844,7.701 12.911,7.722 12.973,7.755 13.027,7.799 13.071,7.853 13.104,7.915 13.125,7.982 13.132,8.052 13.125,8.122 13.104,8.189 13.071,8.25 13.027,8.304 12.973,8.349 12.911,8.382 12.844,8.402
no net on Bottom Layer "Bottom Layer-No Net 7" (solid, pour order 27): 9.927,7.495 9.857,7.488 9.79,7.468 9.728,7.435 9.674,7.39 9.63,7.336 9.597,7.274 9.576,7.207 9.57,7.137 9.576,7.068 9.597,7.001 9.63,6.939 9.674,6.885 9.728,6.84 9.79,6.807 9.857,6.787 9.927,6.78 9.997,6.787 10.064,6.807 10.125,6.84 10.179,6.885 10.224,6.939 10.257,7.001 10.277,7.068 10.284,7.137 10.277,7.207 10.257,7.274 10.224,7.336 10.179,7.39 10.125,7.435 10.064,7.468 9.997,7.488
no net on Top Layer "Top Layer-No Net" (solid, pour order 37): 587 vertices, not listed, extent 1.52,1.421 13.149,18.255
GND on Top Layer "Top Layer-$Net0 1" (solid, pour order 35): 14.448,14.421 13.872,14.421 13.872,11.233 14.448,11.233 14.448,10.357 13.872,10.357 13.872,9.201 14.448,9.201 14.448,6.293 13.872,6.293 13.872,2.089 14.448,2.089 14.448,0.282 11.625,0.282 11.625,0.858 4.373,0.858 4.373,0.282 2.481,0.282 2.481,0.858 1.325,0.858 1.325,0.282 0.28,0.282 0.28,3.105 0.856,3.105 0.856,10.357 0.28,10.357 0.28,11.233 0.856,11.233 0.856,13.405 0.28,13.405 0.28,21.435 14.448,21.435
no net on Top Layer "Top Layer-$Net0" (solid, pour order 38): 8.71,4.32 5.05,4.32 5.05,7.99 5.452,7.99 5.452,7.942 6.711,7.942 6.711,7.99 8.71,7.99
no net on Top Layer "Top Layer-No Net 1" (solid, pour order 36): 13.104,9.205 12.444,9.205 12.444,8.291 12.492,8.291 12.492,8.269 12.477,8.25 12.444,8.189 12.424,8.122 12.417,8.052 12.424,7.982 12.444,7.915 12.477,7.853 12.521,7.799 12.576,7.755 12.638,7.722 12.705,7.701 12.774,7.695 12.844,7.701 12.911,7.722 12.973,7.755 13.027,7.799 13.071,7.853 13.104,7.915 13.125,7.982 13.132,8.052 13.125,8.122 13.104,8.189 13.071,8.25 13.056,8.269 13.056,8.291 13.104,8.291
GND on GND "Mid-Layer 1-$Net0" (solid, remove dead copper, pour order 0): 280 vertices, not listed, extent 0.28,0.282 14.448,21.435
GND on PWR "Mid-Layer 2-$Net0 3" (solid, remove dead copper, pour order 17): 280 vertices, not listed, extent 0.28,0.282 14.448,21.435

## Other copper
Top Layer:
  pour cut-out: 587 vertices and 0 holes, not listed, extent 1.52,1.421 13.149,18.255

## Silkscreen, mask and mechanical layers (free items; w line width, h text height)
Bottom Overlay:
  drawing of 2734 lines, arcs and shapes, not listed
Top Paste:
  region: 0.887,12.065 0.887,14.859 3.681,14.859 3.681,14.224 1.42,14.224 1.42,12.065
  region: 5.713,14.249 5.713,14.834 8.405,14.834 8.405,14.249
  region: 10.793,14.249 13.282,14.249 13.282,11.811 13.765,11.811 13.765,14.859 10.793,14.859
  region: 13.282,6.223 13.841,6.223 13.841,9.55 13.282,9.55
  region: 10.793,0.889 10.793,1.448 13.231,1.448 13.231,3.683 13.816,3.683 13.816,0.889
  region: 5.713,0.889 9.015,0.889 9.015,1.397 5.713,1.397
  region: 0.887,0.889 3.681,0.889 3.681,1.397 1.395,1.397 1.395,3.708 0.887,3.708
  region: 0.887,6.223 1.395,6.223 1.395,9.525 0.887,9.525
Top Solder:
  region: 0.887,6.223 1.395,6.223 1.395,9.525 0.887,9.525
  region: 0.887,0.889 3.681,0.889 3.681,1.397 1.395,1.397 1.395,3.708 0.887,3.708
  region: 5.713,0.889 9.015,0.889 9.015,1.397 5.713,1.397
  region: 10.793,0.889 10.793,1.448 13.231,1.448 13.231,3.683 13.816,3.683 13.816,0.889
  region: 13.282,6.223 13.841,6.223 13.841,9.55 13.282,9.55
  region: 10.793,14.249 13.282,14.249 13.282,11.811 13.765,11.811 13.765,14.859 10.793,14.859
  region: 5.713,14.249 5.713,14.834 8.405,14.834 8.405,14.249
  region: 0.887,12.065 0.887,14.859 3.681,14.859 3.681,14.224 1.42,14.224 1.42,12.065
Bottom Solder:
  region: 4.953,4.216 4.953,8.001 8.763,8.001 8.763,4.216
BOARD:
  the board outline again, w0.1
FAB NOTES:
  lines w0.381: 0.241,33.414 10.653,33.414 34.269,33.414 56.107,33.414 72.612,33.414 87.087,33.414 ; 0.241,36.462 10.653,36.462 34.269,36.462 56.107,36.462 72.612,36.462 87.087,36.462 ; 0.241,39.51 10.653,39.51 34.269,39.51 56.107,39.51 72.612,39.51 87.087,39.51 ; 0.241,42.558 10.653,42.558 34.269,42.558 56.107,42.558 72.612,42.558 87.087,42.558 ; 0.241,45.606 10.653,45.606 34.269,45.606 56.107,45.606 72.612,45.606 87.087,45.606 ; 0.241,48.654 10.653,48.654 34.269,48.654 56.107,48.654 72.612,48.654 87.087,48.654 ; 0.241,51.702 10.653,51.702 34.269,51.702 56.107,51.702 72.612,51.702 87.087,51.702 ; 0.241,54.75 10.653,54.75 34.269,54.75 56.107,54.75 72.612,54.75 87.087,54.75 ; 0.241,57.798 10.653,57.798 34.269,57.798 56.107,57.798 72.612,57.798 87.087,57.798 ; 0.241,60.846 10.653,60.846 34.269,60.846 56.107,60.846 72.612,60.846 87.087,60.846 ; 0.241,63.894 87.087,63.894 ; 10.653,66.942 10.653,30.366 ; 34.269,66.942 34.269,30.366 ; 56.107,66.942 56.107,30.366 ; 72.612,66.942 72.612,30.366 ; 10.653,30.366 0.241,30.366 0.241,66.942 87.087,66.942 87.087,30.366 72.612,30.366 ; 10.653,30.366 34.269,30.366 ; 34.269,30.366 56.107,30.366 ; 56.107,30.366 72.612,30.366
  text "NOTES: UNLESS OTHERWISE SPECIFIED." at 130.263,113.228 h3.17
  text "1. FABRICATE PER IPC-6012A CLASS 2." at 139.981,104.395 h3.17
  text "2. MATERIAL: FR-4 PER IPC-4101C" at 139.981,97.748 h3.17
  text "3. PCB THICKNESS OF 0.8mm +/-0.1mm" at 139.981,90.798 h3.17
  text "4. COPPER WEIGHT: 0.5OZ ON EXTERNAL LAYERS & 1OZ ON INTERNAL LAYERS" at 140.026,83.385 h3.17
  text "5. PRINTED WIRING BOARD SHALL COMPLY WITH REQUIREMENTS OF ANSI/J-STD-003." at 139.981,74.692 h3.17
  text "6. SURFACE FINISH: ENIG." at 139.981,67.611 h3.17
  text "Layer" at 2.019,64.656 h1.52
  text "Name" at 12.431,64.656 h1.52
  text "Material" at 36.047,64.656 h1.52
  text "Thickness" at 57.885,64.656 h1.52
  text "Constant" at 74.39,64.656 h1.52
  text "Top Overlay" at 12.431,61.608 h1.52
  text "7. SOLDER MASK MATERIAL SHALL MEET ALL THE REQUIREMENTS OF" at 139.981,60.511 h3.17
  text "Top Solder" at 12.431,58.56 h1.52
  text "Solder Resist" at 36.047,58.56 h1.52
  text "0.40mil" at 57.885,58.56 h1.52
  text "3.5" at 74.39,58.56 h1.52
  text "1" at 2.019,55.512 h1.52
  text "Top Layer" at 12.431,55.512 h1.52
  text "1.35mil" at 57.885,55.512 h1.52
  text "IPC-SM-840C, SHALL BE GREEN IN COLOR AND APPLIED OVER BARE COPPER." at 146.121,55.328 h3.17
  text "Dielectric 1" at 12.431,52.464 h1.52
  text "PP-006" at 36.047,52.464 h1.52
  text "9.00mil" at 57.885,52.464 h1.52
  text "4.1" at 74.39,52.464 h1.52
  text "2" at 2.019,49.416 h1.52
  text "GND" at 12.431,49.416 h1.52
  text "CF-004" at 36.047,49.416 h1.52
  text "1.35mil" at 57.885,49.416 h1.52
  text "8. ALL PADS ON BOTTOM LAYER SHOULD BE OF SAME DIMENSION IRRESPECTIVE OF SOLDERMASK OPENING(SAME FOR BOTH TRACE" at 139.981,48.979 h3.17
  text "Dielectric 2" at 12.431,46.368 h1.52
  text "PP-006" at 36.047,46.368 h1.52
  text "6.00mil" at 57.885,46.368 h1.52
  text "4.1" at 74.39,46.368 h1.52
  text "3" at 2.019,43.32 h1.52
  text "PWR" at 12.431,43.32 h1.52
  text "CF-004" at 36.047,43.32 h1.52
  text "1.35mil" at 57.885,43.32 h1.52
  text "& COPPER SHAPE CONNECTED PAD SHOULD BE 0.8X0.6 MM)" at 146.121,42.252 h3.17
  text "Dielectric 3" at 12.431,40.272 h1.52
  text "PP-006" at 36.047,40.272 h1.52
  text "9.00mil" at 57.885,40.272 h1.52
  text "4.1" at 74.39,40.272 h1.52
  text "4" at 2.019,37.224 h1.52
  text "Bottom Layer" at 12.431,37.224 h1.52
  text "1.35mil" at 57.885,37.224 h1.52
  text "9. SILK SCREEN LEGEND TO BE APPLIED PER LAYER STACKUP USING WHITE" at 139.981,34.324 h3.17
  text "Bottom Solder" at 12.431,34.176 h1.52
  text "Solder Resist" at 36.047,34.176 h1.52
  text "0.40mil" at 57.885,34.176 h1.52
  text "3.5" at 74.39,34.176 h1.52
  text "Bottom Overlay" at 12.431,31.128 h1.52
  text "NON-CONDUCTIVE EPOXY INK." at 146.121,27.975 h3.17
  text "10. 100% CONTINUITY TESTING USING DATABASE NETLIST SHALL BE PERFORMED," at 139.981,21.708 h3.17
  text "11. THIS PRINTED WIRING BOARD IS DESIGNED WITH A MINIMUM CONDUCTOR" at 139.981,13.453 h3.17
  text "WIDTH AND SPACING OF 4MIL & 4MIL" at 145.454,7.975 h3.17
  text "12. VIAS WITH 10 MIL DRILL ARE PLUGGED WITH NON CONDUCTIVE SOLDERMASK INK ON BOTTOM SIDE PRESENT ON THERMAL PAD." at 134.391,-0.775 h3.17
  text "OTHER VIAS ARE TO BE COMLETELY MASKED/TENTED" at 145.454,-3.275 h3.17
  text "13. BOARD DIMENSIONS ARE IN MILLIMETERS." at 140.132,-9.677 h3.17
  text "14. VENDOR SHOULD FOLLOW ROHS COMPLIANT PROCESS FOR MANUFACTURING" at 139.981,-17.634 h3.17
  text "15. MANUFACTURER'S IDENTIFICATION ,DATECODE LETTER SHALL BE SILKSCREENED ON SOLDER SIDE" at 139.981,-25.1 h3.17
  text "16. THIS IS A IMPEDANCE CONTROL BOARD. PLEASE REFER THE STACKUP" at 139.981,-32.857 h3.17
  text "17. COPPER EXPOSES OVER BOARD OUTLINE. RUN AS IS." at 139.981,-41.451 h3.17
  text "18. PCB SHOULD BE FREE OF HALOGEN." at 139.981,-49.96 h3.17
Drill Drawing:
  circle w0.254: c30.826,8.479 r0.847
  lines w0.254: 29.979,11.443 31.673,11.443 31.673,13.136 29.979,13.136 29.979,11.443
  lines w0.381: 28.461,6.49 133.234,6.49 ; 28.461,14.11 133.234,14.11 ; 42.453,2.68 42.453,17.92 ; 57.689,2.68 57.689,17.92 ; 85.621,2.68 85.621,17.92 ; 98.47,2.68 98.47,17.92 ; 117.109,2.68 117.109,17.92 ; 28.461,2.68 133.234,2.68 133.234,17.92 28.461,17.92 28.461,2.68
  text "Symbol" at 30.747,15.253 h1.83
  text "Count" at 43.596,15.253 h1.83
  text "Hole Size" at 58.832,15.253 h1.83
  text "Plated" at 86.764,15.253 h1.83
  text "Hole Type" at 99.613,15.253 h1.83
  text "Via/Pad" at 118.252,15.253 h1.83
  text "246" at 43.596,11.443 h1.52
  text "10.00mil (0.254mm)" at 58.832,11.443 h1.52
  text "PTH" at 86.764,11.443 h1.52
  text "Round" at 99.613,11.443 h1.52
  text "(Mixed)" at 118.252,11.443 h1.52
  text "28" at 43.596,7.633 h1.52
  text "25.00mil (0.635mm)" at 58.832,7.633 h1.52
  text "PTH" at 86.764,7.633 h1.52
  text "Round" at 99.613,7.633 h1.52
  text "Pad" at 118.252,7.633 h1.52
  text "274 Total" at 43.596,3.823 h1.52

## Dimensions
14.73,21.72 to 14.73,0 on Drill Drawing
0,21.72 to 14.73,21.72 on Drill Drawing